# Altium PCB RYA_ESC.PcbDoc (part 3 of 4)
Units mm, origin at the board's own origin, x right, y up, seen from the top; angles counter-clockwise.
Board outline 81.86 x 50.16 mm, 4 copper layers (Top Layer, Signal1, Signal2, Bottom Layer), stack 1.586 mm thick; 309 components, 155 nets, 862 pads, 372 vias.
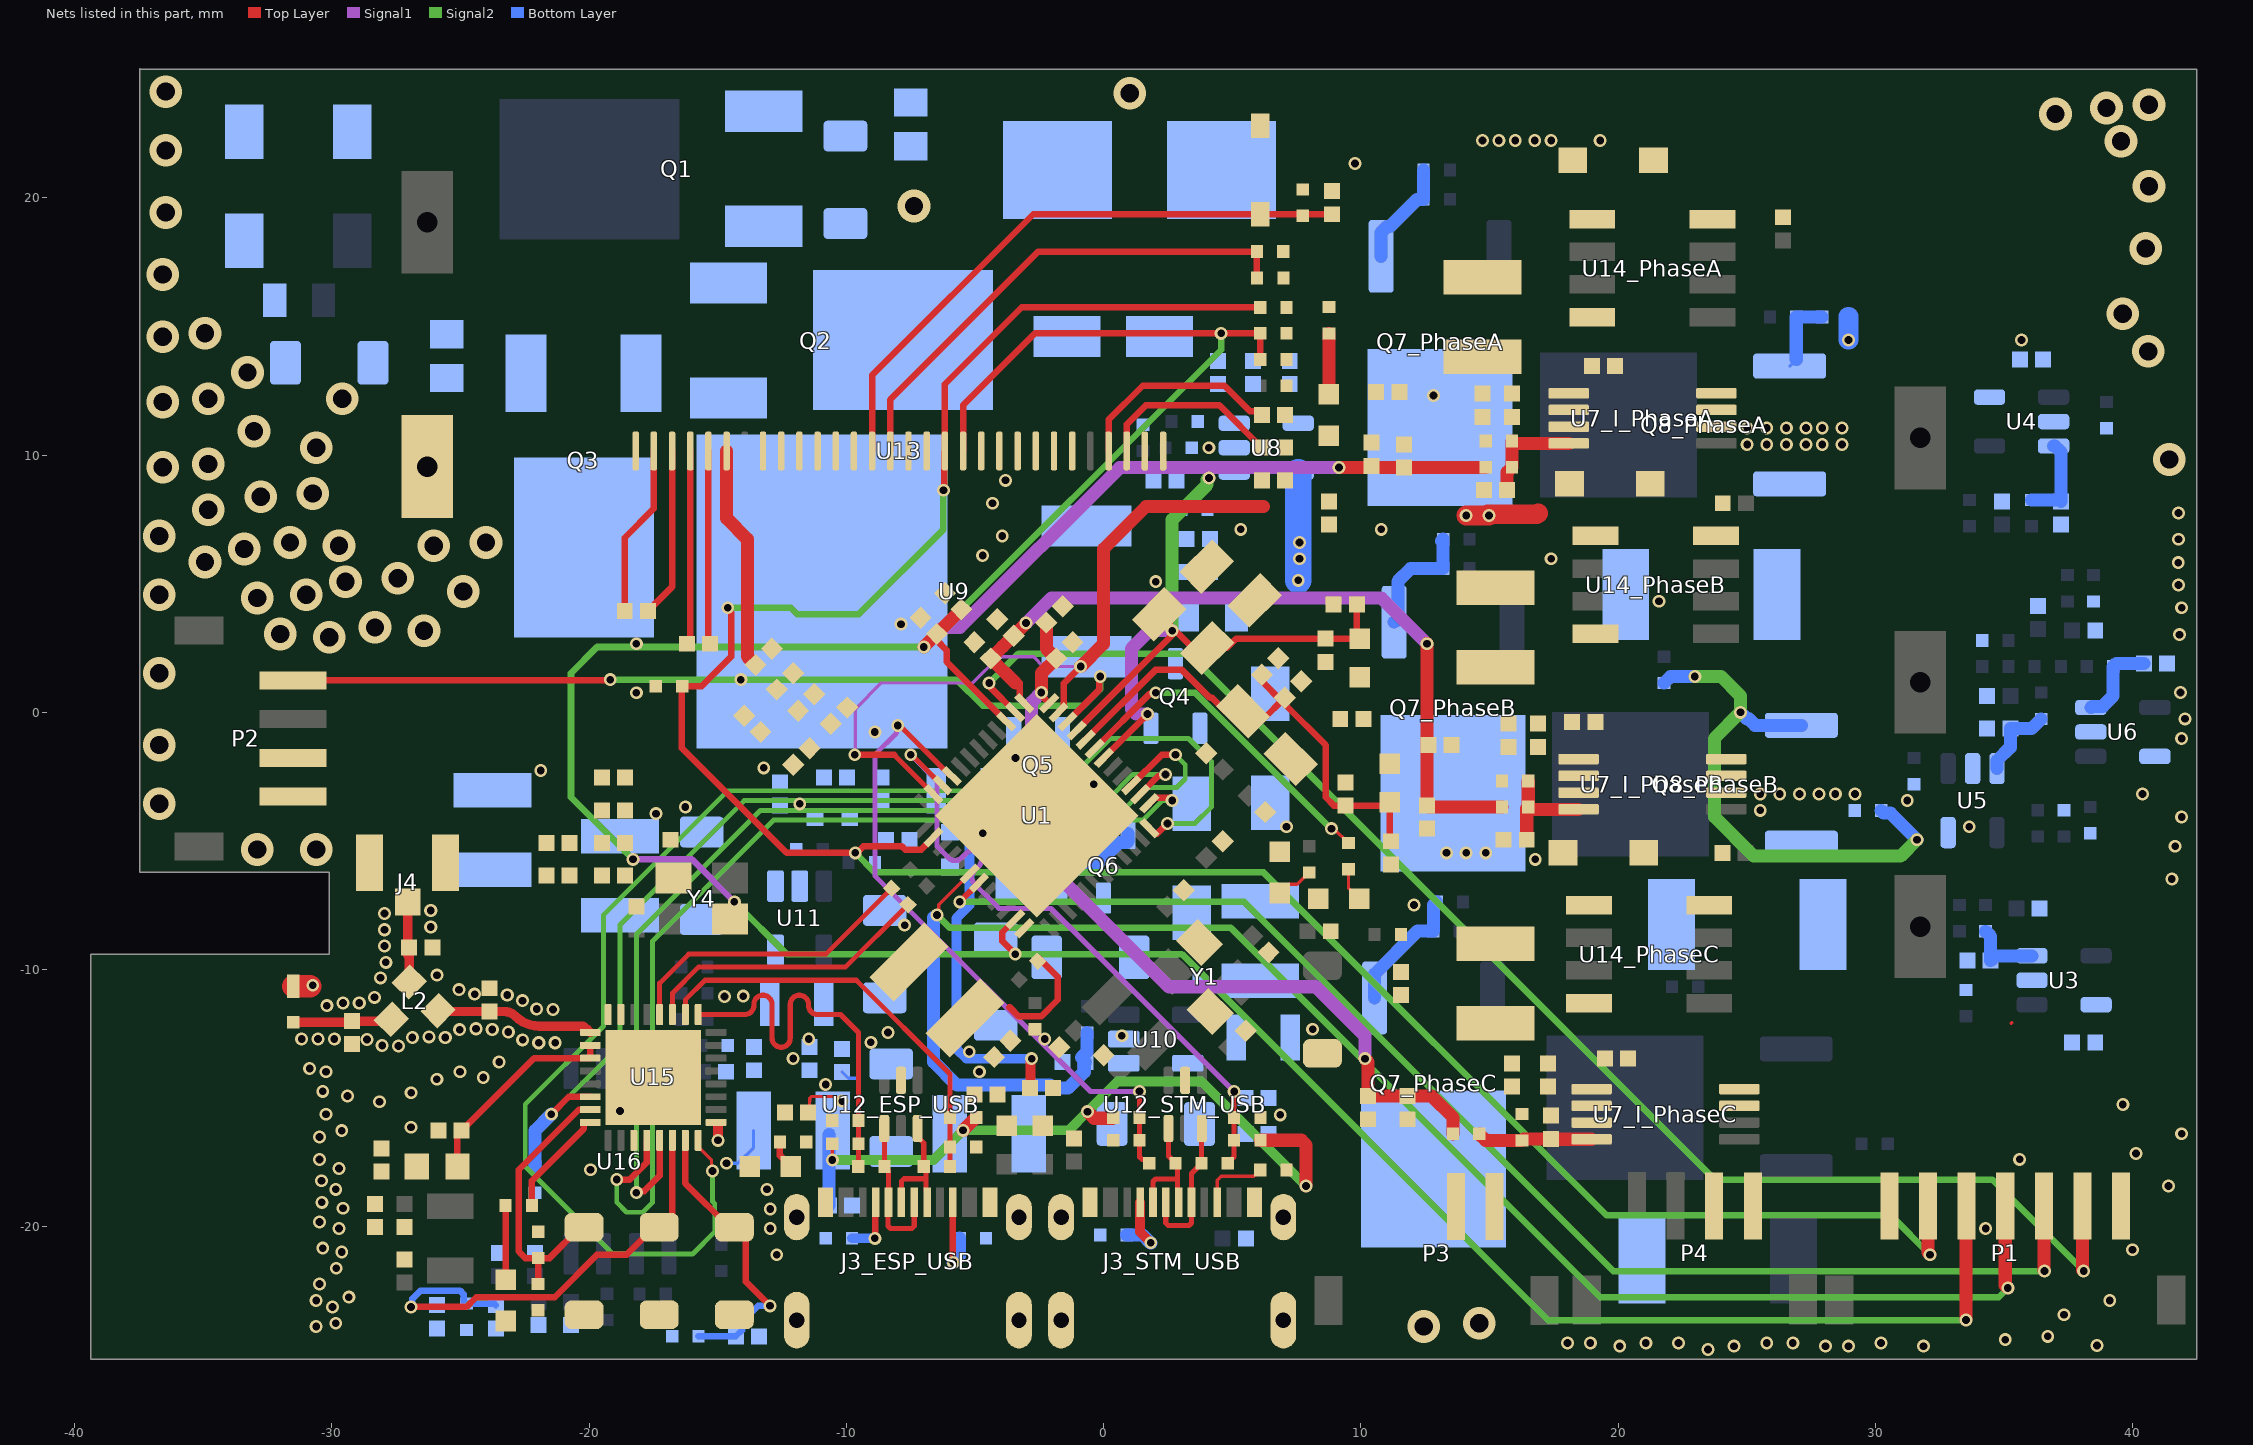
[diagram p4: the nets of this part, all layers, seen from the top]

## Via types
v1: diameter 0.5, hole 0.3, Top Layer to Bottom Layer, tented both sides, 148 vias
v2: diameter 0.5, hole 0.3, Top Layer to Signal1, tented both sides, 58 vias
v3: diameter 0.5, hole 0.3, Top Layer to Signal2, tented both sides, 52 vias
v4: diameter 1.27, hole 0.711, Top Layer to Bottom Layer, tented both sides, 48 vias
v5: diameter 0.508, hole 0.3, Top Layer to Bottom Layer, tented both sides, 34 vias
v6: diameter 0.5, hole 0.3, Bottom Layer to Signal2, tented both sides, 19 vias
v7: diameter 0.5, hole 0.3, Bottom Layer to Signal1, tented both sides, 5 vias
v8: diameter 1.27, hole 0.711, Top Layer to Bottom Layer, 4 vias
v9: diameter 0.5, hole 0.3, Signal1 to Signal2, tented both sides, 4 vias

## Nets (pads, with @x,y where several pads share a name; then routed paths per layer and width w, separated by ;. In a path a pad name is that pad's centre, name@x,y a point inside that pad or via, vN(x,y) a via of type N, cw(c..) or ccw(c..) an arc to the next point about the centre after c; other vN are vias at no path point) (continued)
GND: Ant1.GND C1.2 C2.1 C3.1 C4.1 C5.1 C6.1 C7.1 C8.2 C9.2 C10.1 C11.1 C12.1 C13.2 C14.1 C15.1 C16.1 C17.1 C18.1 C19.1 C20.1 C21.1 C22.1 C23.1 C24.1 C25.1 C26.1 C27.1 C28.1 C29.1 C30.1 C31.1 C32.1 C33.1 C34.1 C35.1 C36.1 C37_I_PhaseA.2 C37_I_PhaseB.2 C37_I_PhaseC.2 C38_I_PhaseA.1 C38_I_PhaseB.1 C38_I_PhaseC.1 C39_I_PhaseA.1 C39_I_PhaseB.1 C39_I_PhaseC.1 C40_I_PhaseA.1 C40_I_PhaseB.1 C40_I_PhaseC.1 C41_I_PhaseA.1 C41_I_PhaseB.1 C41_I_PhaseC.1 C42_I_PhaseA.1 C42_I_PhaseB.1 C42_I_PhaseC.1 C43_I_PhaseA.1 C43_I_PhaseB.1 C43_I_PhaseC.1 C44_I_PhaseA.1 C44_I_PhaseB.1 C44_I_PhaseC.1 C45_I_PhaseA.1 C45_I_PhaseB.1 C45_I_PhaseC.1 C46_I_PhaseA.1 C46_I_PhaseB.1 C46_I_PhaseC.1 C47.1 C48.1 C49.1 C50.1 C51.2 C52.1 C53.1 C54.1 C55.2 C56.1 C57.1 C58.2 C59.1 C60.1 C61.2 C62.1 C63.1 C64.2 C65.1 C66.1 C67.1 C68.1 C69_ESP_USB.1 C69_STM_USB.1 C70_ESP_USB.1 C70_STM_USB.1 C73.1 C74.1 C75.1 C76.1 C77.1 C78.1 C80.2 C81.1 C82.1 C83.1 C84.1 C85.1 C86.1 C87.1 C88.1 C89.1 C90.1 C91.1 C92.1 C93.1 C94.1 C95.1 C96.1 C97.1 C98.1 C99.1 C100.1 C101.1 C102.1 C103.1 C104.1 C105.1 C106.1 C107.1 D1.1 D2.1 D3.A D4.A D5.1 D6.A D7.A D8.1 D11.C D12.A D14.A D15.C D16.A D19.1 J1.1 J3_ESP_USB.A1B12 J3_ESP_USB.B1A12 J3_ESP_USB.SH1 J3_ESP_USB.SH2 J3_ESP_USB.SH3 J3_ESP_USB.SH4 J3_STM_USB.A1B12 J3_STM_USB.B1A12 J3_STM_USB.SH1 J3_STM_USB.SH2 J3_STM_USB.SH3 J3_STM_USB.SH4 J4.2 J4.3 P1.7 P2.3 P3.3 P4.3 Q2.1 Q3.4 Q4.1 Q5.1 Q6.3 R6.1 R14.1 R16.1 R17.1 R18.1 R21.1 R22.1 R24.1 R26_I_PhaseA.2 R26_I_PhaseB.2 R26_I_PhaseC.2 R27_I_PhaseA.1 R27_I_PhaseB.1 R27_I_PhaseC.1 R30.1 R31.1 R34.1 R37.1 R39.1 R41_ESP_USB.2 R41_STM_USB.2 R46_ESP_USB.1 R46_STM_USB.1 R47_ESP_USB.1 R47_STM_USB.1 R48_ESP_USB.1 R48_STM_USB.1 R49.1 R54.1 R55.1 R56.1 R73.1 U1.49 U2.1 U3.2 U4.2 U5.2 U6.2 U7_I_PhaseA.3 U7_I_PhaseA.4 U7_I_PhaseA.7 U7_I_PhaseB.3 U7_I_PhaseB.4 U7_I_PhaseB.7 U7_I_PhaseC.3 U7_I_PhaseC.4 U7_I_PhaseC.7 U8.2 U9.3 U10.2 U11.2 U12_ESP_USB.2 U12_STM_USB.2 U13.1 U13.8 U13.10 U13.12 U13.13 U13.16 U13.17 U13.21 U13.22 U13.23 U13.24 U13.25 U13.29 U13.30 U14_PhaseA.4 U14_PhaseB.4 U14_PhaseC.4 U15.33 U16.4 U17.1 U18.1 U19.1 Y1.2 Y1.4 Y4.2 Y4.4 | length 3.3
  Top Layer w0.127: v1@-30.841,-10.648 ccw(c-30.841,-10.508) v1(-30.742,-10.607)
  Top Layer w0.889: Ant1.GND@-31.496,-10.648 v1@-30.841,-10.648
  Bottom Layer w0.127: v1(-14.652,-17.526) -14.212,-17.526 -13.605,-16.919 C64.2@-13.605,-16.256 ; C65.1@-10.16,-13.981 -9.914,-14.228 -9.648,-14.228
  other v1: 23.495,-24.765 20.066,-24.638 24.511,-24.638 28.067,-24.638 28.956,-24.638 31.877,-24.638 38.618,-24.608 18.034,-24.511 18.923,-24.511 21.082,-24.511 22.352,-24.511 25.781,-24.511 26.797,-24.511 30.226,-24.511 35.052,-24.384 36.703,-24.257 -30.607,-23.876 -29.845,-23.749 37.332,-23.415 -29.972,-23.114 -30.607,-22.86 39.116,-22.86 -29.337,-22.733 -30.48,-22.225 -29.824,-21.607 -29.614,-20.976 39.995,-20.889 -30.353,-20.828 -29.718,-20.066 34.29,-20.066 -30.48,-19.812 -29.561,-19.276 -30.385,-19.048 -29.845,-18.542 41.402,-18.415 -30.403,-18.206 -29.719,-17.733 -30.473,-17.382 35.611,-17.377 40.132,-17.145 -30.48,-16.51 41.91,-16.383 -29.614,-16.26 6.868,-15.646 -30.226,-15.621 39.624,-15.24 -28.141,-15.138 -29.386,-14.91 -26.914,-14.788 -30.353,-14.732 -10.802,-14.469 -25.915,-14.262 -24.109,-14.192 -30.226,-13.97 -25.019,-13.97 -30.861,-13.843 -23.495,-13.589 -8.382,-12.446 12.065,-7.493 41.529,-6.477 41.656,-5.207 41.91,-4.064 31.242,-3.429 41.91,-1.016 42.037,-0.254 41.867,0.767 41.822,3.021 41.91,4.064 21.59,4.318 41.783,4.953 2.032,5.08 41.776,5.819 17.399,5.969 -4.699,6.096 41.783,6.731 -3.937,6.858 5.334,7.112 41.783,7.747 -4.318,8.128 -3.81,9.017 4.093,10.287
  other v2: -12.7,-21.082 -12.954,-20.066 -12.954,-19.304 -13.081,-18.542 -18.796,-15.494 -12.065,-13.452 -9.044,-12.827 -11.459,-12.7 0.711,-12.572 -14.732,-11.049 -14.006,-11.031 -7.731,-8.271 7.112,-4.445 -17.399,-3.937 -16.256,-3.683 -11.811,-3.556 -0.381,-2.794 -13.208,-2.159 -3.425,-1.778 -8.89,-0.762 -18.161,2.667 -7.874,3.429
  other v3: -4.826,-13.97 -4.699,-4.699
  other v4: -32.893,-5.334 -30.607,-5.334 -36.703,-3.556 -36.703,-1.27 -36.703,1.524 -30.099,2.921 -32.004,3.048 -26.416,3.175 -28.321,3.302 -32.893,4.445 -36.703,4.572 -30.988,4.572 -24.892,4.699 -29.464,5.08 -27.432,5.207 -34.925,5.842 -33.401,6.35 -29.718,6.477 -26.035,6.477 -31.623,6.604 -24.003,6.604 -36.703,6.858 -34.798,7.874 -32.766,8.382 -30.734,8.509 -36.576,9.525 -34.798,9.652 41.431,9.825 -30.607,10.287 -33.02,10.922 -36.576,12.065 -34.798,12.192 -29.591,12.192 -33.274,13.208 40.612,14.03 -36.576,14.605 -34.925,14.732 39.624,15.494 -36.576,17.018 40.513,18.034 -36.449,19.431 40.64,20.447 -36.449,21.844 39.551,22.196 37.006,23.256 38.989,23.495 40.64,23.622 -36.449,24.13
  other v5: -27.407,-12.974 -28.042,-12.953 -21.953,-12.843 -21.318,-12.843 -28.631,-12.717 -22.578,-12.73 -31.171,-12.695 -30.536,-12.695 -29.901,-12.695 -26.867,-12.64 -25.589,-12.637 -26.223,-12.612 -23.135,-12.425 -25.03,-12.335 -23.762,-12.324 -24.396,-12.299 -21.402,-11.549 -22.036,-11.533 -30.193,-11.401 -29.566,-11.3 -28.931,-11.297 -22.582,-11.208 -28.336,-11.077 -23.178,-10.989 -24.445,-10.953 -25.056,-10.782 -28.107,-10.319 -25.912,-10.218 -27.898,-9.719 -27.949,-9.086 -27.949,-8.451 -26.153,-8.341 -27.949,-7.816 -26.153,-7.706
  other v6: -2.286,-12.7
  other v8: 12.446,-23.876 14.605,-23.749 -7.366,19.685 1.023,24.069
GPIO3: R72.2 U15.8 | length 4.3
  Top Layer w0.254: R72.2@-22.221,-19.173 -22.221,-18.212 -20.202,-16.193 -20.202,-16.014 -20.131,-15.942 U15.8@-19.951,-15.942
GPIO8: C105.2 R68.1 U15.14 U19.2 | length 18.6
  Top Layer w0.254: v1(-26.924,-23.114) -24.765,-23.114 -24.384,-22.733 -21.336,-22.733 -19.69,-21.087 -18.542,-21.087 -17.472,-20.017 -17.233,-20.017 -16.756,-19.54 U15.14@-16.756,-16.637
  Bottom Layer w0.254: v1(-26.924,-23.114) -26.877,-23.067 -26.877,-22.893 -26.863,-22.879 -26.863,-22.799 -26.543,-22.479 -25.019,-22.479 -24.869,-22.629 -24.869,-22.883 R68.1@-24.769,-22.983 -23.684,-22.983 C105.2@-23.622,-23.045
GPIO9: C104.2 R67.1 U15.15 U18.2 | length 11.3
  Top Layer w0.254: U15.15@-16.256,-16.637 -16.256,-18.312 -14.551,-20.017 -14.387,-20.017 -13.909,-20.494 -13.909,-22.126 v1(-12.965,-23.071)
  Bottom Layer w0.254: R67.1@-15.744,-24.253 -14.297,-24.253 C104.2@-14.293,-24.257 -14.047,-24.01 -14.047,-23.699 -13.419,-23.071 v1(-12.965,-23.071)
I_PhaseA: C43_I_PhaseA.2 C44_I_PhaseA.2 C45_I_PhaseA.2 C46_I_PhaseA.2 R25_I_PhaseA.2 U1.27 | length 31.3
  Top Layer w0.254: C46_I_PhaseA.2@-6.476,3.047 -6.476,2.788 -6.096,2.408 -6.096,1.96 U1.27@-3.783,-0.354
  Top Layer w0.508: v2(-6.985,2.54) -6.982,2.54 C46_I_PhaseA.2@-6.476,3.047 ; C46_I_PhaseA.2@-6.436,3.087 C45_I_PhaseA.2@-5.524,3.999 ; v2(9.155,9.514) C43_I_PhaseA.2@11.684,9.514 11.695,9.525 R25_I_PhaseA.2@14.855,9.525
  Signal1 w0.508: v2(-6.985,2.54) -6.223,3.302 -5.588,3.302 0.624,9.514 v2(9.155,9.514)
I_PhaseB: C43_I_PhaseB.2 C44_I_PhaseB.2 C45_I_PhaseB.2 C46_I_PhaseB.2 R25_I_PhaseB.2 U1.25 | length 30.2
  Top Layer w0.254: -3.254,1.143 -3.254,0.603 -3.284,0.573 -3.284,0.562 U1.25@-3.075,0.354
  Top Layer w0.508: -3.429,1.143 C43_I_PhaseB.2@-4.381,2.095 -4.341,2.134 -3.936,2.539 -3.897,2.578 C44_I_PhaseB.2@-3.492,2.984 -3.492,2.991 v2(-3.01,3.473) ; C45_I_PhaseB.2@12.573,-1.27 C46_I_PhaseB.2@12.573,-3.614 12.642,-3.683 R25_I_PhaseB.2@15.49,-3.683 ; v2(12.573,2.667) 12.573,-1.028 12.575,-1.03 12.575,-1.214 C45_I_PhaseB.2@12.603,-1.242 ; C45_I_PhaseB.2@12.575,-1.27 C45_I_PhaseB.2@12.603,-1.242 ; C45_I_PhaseB.2@12.631,-1.27 C45_I_PhaseB.2@12.603,-1.242 ; C45_I_PhaseB.2@12.631,-1.214 C45_I_PhaseB.2@12.603,-1.242
  Signal1 w0.508: v2(-3.01,3.473) -3.002,3.473 -2.031,4.445 10.795,4.445 v2(12.573,2.667)
I_PhaseC: C43_I_PhaseC.2 C44_I_PhaseC.2 C45_I_PhaseC.2 C46_I_PhaseC.2 R25_I_PhaseC.2 U1.24 | length 32.6
  Top Layer w0.254: v2(-2.416,0.774) -2.369,0.727 -2.369,0.616 U1.24@-2.107,0.354
  Top Layer w0.508: v2(-2.416,0.774) -2.416,1.521 C43_I_PhaseC.2@-1.842,2.095 -2.223,2.476 C46_I_PhaseC.2@-2.223,3.492 ; v2(10.16,-13.462) 10.287,-13.589 C45_I_PhaseC.2@10.287,-14.917 C44_I_PhaseC.2@11.811,-14.917 12.758,-14.917 13.585,-15.744 R25_I_PhaseC.2@13.585,-16.383
  Signal1 w0.508: v2(-2.416,0.774) -2.794,0.396 -2.794,-5.334 2.54,-10.668 8.255,-10.668 10.16,-12.573 v2(10.16,-13.462)
IPEX: C89.2 J4.1 L2.1 | length 3.3
  Top Layer w0.363: C89.2@-27.051,-9.437 -27.051,-9.202 C89.2@-26.993,-9.144 -27.051,-9.086 J4.1@-27.051,-7.367 ; L2.1@-27.043,-10.482 L2.1@-26.96,-10.454 ; L2.1@-26.987,-10.481 C89.2@-26.987,-9.437
LNA_IN: C96.2 L2.2 U15.1 | length 6.2
  Top Layer w0.363: L2.2@-25.87,-11.599 L2.2@-25.787,-11.57 ; L2.2@-25.843,-11.626 L2.2@-25.787,-11.57 ; U15.1@-20.102,-12.323 -20.229,-12.196 -21.931,-12.196 cw(c-21.931,-10.882) -22.86,-11.811 ccw(c-23.307,-12.258) -23.307,-11.626 C96.2@-23.876,-11.626 -25.481,-11.626 -25.536,-11.57 L2.2@-25.787,-11.57 ; U15.1@-20.07,-12.323 U15.1@-19.951,-12.442
MCU3V3: R42_ESP_USB.2 R42_STM_USB.2 R43_ESP_USB.2 R43_STM_USB.2 | length 27.2
  Top Layer w0.127: R42_ESP_USB.2@-10.545,-16.768 -10.545,-17.395 v3(-10.541,-17.399)
  Top Layer w0.508: v3(-5.465,-16.249) -5.454,-16.249 R43_ESP_USB.2@-4.949,-15.744 ; v3(-0.625,-15.521) -0.578,-15.567 -0.367,-15.778 R42_STM_USB.2@0.351,-15.778 ; R43_STM_USB.2@6.1,-16.633 7.688,-16.633 7.874,-16.819 v3(7.874,-18.415)
  Signal2 w0.381: v3(-10.541,-17.399) -6.615,-17.399 v3(-5.465,-16.249) -1.353,-16.249 v3(-0.625,-15.521) 0.545,-14.351 3.81,-14.351 v3(7.874,-18.415)
NetC8_1: C8.1 C9.1 C10.2 C11.2 FB1.2 U1.21 | length 15.8
  Top Layer w0.254: U1.21@-1.046,-0.707 2.815,3.154 ; C9.1@2.159,3.81 2.815,3.154 ; C8.1@3.552,2.503 C8.1@4.027,2.503 ; C10.2@9.848,4.191 9.848,2.967 FB1.2@9.957,2.858 9.952,2.863 C11.2@8.636,2.863 5.153,2.863 4.792,2.503 C8.1@4.027,2.503 ; 2.815,3.154 3.466,2.503 C8.1@4.027,2.503
NetC13_1: C13.1 C14.2 C15.2 C16.2 C17.2 FB2.2 U1.20 | length 20.8
  Top Layer w0.254: U1.20@-0.692,-1.061 2.019,1.651 3.048,1.651 4.14,0.559 4.226,0.559 4.748,0.037 C13.1@5.424,0.037 ; C17.2@6.159,1.46 6.159,1.206 6.921,0.444 C13.1@6.309,-0.168 ; C14.2@7.048,0.571 7.048,0.444 7.048,0.317 8.636,-1.271 8.636,-3.302 8.959,-3.625 C15.2@9.398,-3.625 10.993,-3.625 FB2.2@11.125,-3.493 11.125,-4.96 C16.2@11.176,-5.011 ; C13.1@5.424,0.037 C13.1@5.629,-0.168 ; C13.1@5.424,0.037 C13.1@5.629,-0.168 ; C13.1@5.629,-0.168 C13.1@6.309,-0.168 ; C13.1@5.629,-0.168 C13.1@6.309,-0.168
NetC23_2: C23.2 R12.1 U3.3 | length 2.9
  Bottom Layer w0.508: R12.1@34.29,-8.513 34.486,-8.709 C23.2@34.486,-9.652 34.674,-9.464 U3.3@36.093,-9.464
NetC28_2: C28.2 R19.1 U4.3 | length 3.5
  Bottom Layer w0.508: R19.1@36.068,8.259 37.149,8.259 C28.2@37.211,8.197 37.211,10.123 36.981,10.353 U4.3@36.932,10.353
NetC30_2: C30.2 R20.1 U5.3 | length 3.1
  Bottom Layer w0.508: U5.3@34.732,-2.184 34.732,-1.874 35.248,-1.358 C30.2@35.248,-0.635 36.072,-0.635 R20.1@36.449,-0.258
NetC34_2: C34.2 R23.1 U6.3 | length 3.4
  Bottom Layer w0.508: U6.3@38.379,0.188 38.425,0.234 38.842,0.234 39.247,0.639 R23.1@39.247,1.778 39.374,1.905 C34.2@40.444,1.905
NetC42_I_PhaseA_2: C42_I_PhaseA.2 R25_I_PhaseA.1 R27_I_PhaseA.2 U7_I_PhaseA.8 | length 4.2
  Top Layer w0.508: C42_I_PhaseA.2@15.69,8.636 15.69,9.336 R25_I_PhaseA.1@15.879,9.525 R27_I_PhaseA.2@15.879,10.545 15.969,10.455 U7_I_PhaseA.8@18.085,10.455
NetC42_I_PhaseB_2: C42_I_PhaseB.2 R25_I_PhaseB.1 R27_I_PhaseB.2 U7_I_PhaseB.8 | length 4.3
  Top Layer w0.508: C42_I_PhaseB.2@16.452,-4.953 16.452,-3.745 R25_I_PhaseB.1@16.514,-3.683 ; R27_I_PhaseB.2@16.51,-2.667 16.51,-3.679 R25_I_PhaseB.1@16.514,-3.683 ; U7_I_PhaseB.8@18.466,-3.769 16.6,-3.769 R25_I_PhaseB.1@16.514,-3.683
NetC42_I_PhaseC_2: C42_I_PhaseC.2 R25_I_PhaseC.1 R27_I_PhaseC.2 U7_I_PhaseC.8 | length 4.5
  Top Layer w0.508: R25_I_PhaseC.1@14.609,-16.383 14.609,-16.395 14.855,-16.641 R27_I_PhaseC.2@16.26,-16.641 16.322,-16.579 C42_I_PhaseC.2@17.399,-16.579 17.416,-16.596 U7_I_PhaseC.8@18.974,-16.596
NetC48_2: C48.2 C49.2 C50.2 R29.1 U8.3
NetC55_1: C55.1 C57.2 D3.K FB3.2 R32.2 U10.1 | length 13.6
  Bottom Layer w0.508: -6.604,-7.978 -6.604,-13.589 -5.701,-14.492 -2.077,-14.492 -1.964,-14.605 -1.381,-14.605 -0.749,-13.973 -0.749,-13.645 C57.2@-0.693,-13.589 ; C57.2@-0.859,-13.423 -0.635,-13.199 R32.2@-0.635,-12.45
NetC58_1: C58.1 C59.2 C60.2 D4.K F1.0 U10.5
NetC61_1: C61.1 C63.2 D6.K FB4.2 R35.2 U11.1
NetC64_1: C64.1 C65.2 C66.2 D7.K F2.0 U11.5 | length 3
  Bottom Layer w0.127: C64.1@-10.679,-16.41 C64.1@-10.525,-16.256
  Bottom Layer w0.508: C66.2@-10.679,-19.177 C64.1@-10.679,-16.41
NetC73_2: C73.2 U13.27 | length 8.2
  Top Layer w0.254: U13.27@0.195,10.16 0.195,11.371 1.524,12.7 4.699,12.7 5.702,11.697 6.014,11.697 C73.2@6.154,11.557
NetC74_2: C74.2 U13.28 | length 7.3
  Top Layer w0.254: U13.28@0.902,10.16 0.902,11.189 1.651,11.938 4.503,11.938 C74.2@6.154,10.287
NetC75_2: C75.2 D17.A R53.1 U13.14 | length 23.5
  Top Layer w0.254: U13.14@-8.996,10.16 -8.996,13.102 -2.736,19.362 D17.A@6.096,19.362 7.681,19.362 R53.1@7.743,19.3 7.805,19.362 C75.2@8.89,19.362
NetC79_PhaseA_1: C79_PhaseA.1 D18_PhaseA.K U14_PhaseA.8
NetC79_PhaseB_1: C79_PhaseB.1 D18_PhaseB.K U14_PhaseB.8
NetC79_PhaseC_1: C79_PhaseC.1 D18_PhaseC.K U14_PhaseC.8
NetC90_2: C90.2 L1.1 U15.2 U15.3 | length 8.1
  Top Layer w0.254: L1.1@-25.118,-17.653 -25.118,-16.424 C90.2@-24.95,-16.256 -22.136,-13.442 U15.3@-19.951,-13.442 U15.2@-19.951,-12.942
NetD1_2: D1.2 R1.1 | length 1.3
  Top Layer w0.127: R1.1@9.521,-6.1 9.521,-6.816 D1.2@9.944,-7.239
NetD2_2: D2.2 R4.1 | length 1.5
  Top Layer w0.127: D2.2@6.858,-7.023 7.195,-6.686 7.525,-6.686 7.985,-6.227 R4.1@7.997,-6.227
NetD5_2: D5.2 R33.1 | length 2.4
  Top Layer w0.127: D5.2@8.759,12.361 D5.2@8.763,12.357
  Top Layer w0.508: D5.2@8.759,12.361 R33.1@8.759,14.728
NetD8_2: D8.2 R36.1 | length 1.1
  Top Layer w0.254: R36.1@-12.577,-16.696 -12.577,-17.23 D8.2@-12.154,-17.653
NetD9_A: D9.A D11.A
NetD10_A: D10.A Q1.1 R39.2
NetD10_K: D10.K Q1.3 Q2.3 Q3.3 R38.2
NetD12_K: D12.K Q3.1 R38.1
NetD13_A: D13.A D15.A
NetD14_K: D14.K Q4.2 Q5.2 Q6.2 R40.2 | length 4.2
  Bottom Layer w0.508: R40.2@-1.944,-6.731 -1.881,-6.794 -1.648,-6.562 -1.648,-6.181 -1.563,-6.096 -0.432,-6.096 0.599,-5.065 0.909,-5.065 0.95,-5.024 Q6.2@0.95,-4.714
NetD16_K: D16.K Q6.1 R40.1
NetD19_2: D19.2 R72.1 | length 2.9
  Top Layer w0.254: R72.1@-23.245,-19.173 -23.245,-22.056 D19.2@-23.241,-22.06
NetF3_1: F3.1 Q2.4
NetF4_0: F4.0 Q5.3
NetJ3_ESP_USB_A5: J3_ESP_USB.A5 R41_ESP_USB.1 | length 2.3
  Top Layer w0.127: v1(-8.89,-20.447) v1@-8.874,-20.431 ; J3_ESP_USB.A5@-8.874,-19.066 J3_ESP_USB.A5@-8.857,-19.05
  Top Layer w0.254: v1@-8.874,-20.431 J3_ESP_USB.A5@-8.874,-19.066
  Bottom Layer w0.127: v1@-8.894,-20.443 v1(-8.89,-20.447)
  Bottom Layer w0.381: R41_ESP_USB.1@-9.775,-20.443 v1@-8.894,-20.443
NetJ3_ESP_USB_B5: J3_ESP_USB.B5 R48_ESP_USB.2 | length 3.4
  Top Layer w0.254: J3_ESP_USB.B5@-5.857,-19.05 -5.857,-21.364 v1(-5.842,-21.379)
  Bottom Layer w0.508: v1(-5.842,-21.379) -5.592,-21.129 R48_ESP_USB.2@-5.592,-20.443
NetJ3_STM_USB_A5: J3_STM_USB.A5 R41_STM_USB.1 | length 2.8
  Top Layer w0.381: J3_STM_USB.A5@1.421,-19.05 1.421,-20.203 v1(1.838,-20.62)
  Bottom Layer w0.508: R41_STM_USB.1@0.893,-20.316 1.519,-20.316 1.823,-20.62 v1(1.838,-20.62)
NetJ3_STM_USB_B5: J3_STM_USB.B5 R48_STM_USB.2 | length 2.7
  Top Layer w0.127: J3_STM_USB.B5@4.421,-19.05 4.421,-18.185 4.572,-18.034 5.842,-18.034 5.905,-17.97 5.918,-17.97 6.092,-17.796 R48_STM_USB.2@6.092,-17.784
NetQ7_PhaseA_1: Q7_PhaseA.1 R57_PhaseA.2 R58_PhaseA.2 | length 4.3
  Bottom Layer w0.508: Q7_PhaseA.1@10.791,17.729 10.791,18.659 11.022,18.89 11.139,18.89 12.192,19.943 R58_PhaseA.2@12.442,19.943 R57_PhaseA.2@12.442,21.082
NetQ7_PhaseB_1: Q7_PhaseB.1 R57_PhaseB.2 R58_PhaseB.2 | length 4.8
  Bottom Layer w0.508: Q7_PhaseB.1@11.299,3.505 11.443,3.649 11.443,5.093 11.942,5.592 R58_PhaseB.2@13.204,5.592 13.204,6.604 13.14,6.667 R57_PhaseB.2@13.204,6.731
NetQ7_PhaseC_1: Q7_PhaseC.1 R57_PhaseC.2 R58_PhaseC.2 | length 5.1
  Bottom Layer w0.508: Q7_PhaseC.1@10.537,-11.1 10.537,-10.17 12.202,-8.505 R58_PhaseC.2@12.823,-8.505 12.823,-7.493 R57_PhaseC.2@12.95,-7.366
NetQ8_PhaseA_1: Q8_PhaseA.1 R59_PhaseA.2 R60_PhaseA.2 | length 3
  Bottom Layer w0.127: Q8_PhaseA.1@26.67,13.462 Q8_PhaseA.1@26.928,13.72
  Bottom Layer w0.508: Q8_PhaseA.1@26.928,13.72 R59_PhaseA.2@26.928,15.367 ; R59_PhaseA.2@26.932,15.371 R60_PhaseA.2@27.936,15.371
NetQ8_PhaseA_3: Q8_PhaseA.3 R26_I_PhaseA.1 R60_PhaseA.1 U7_I_PhaseA.2 | length 0.9
  Bottom Layer w0.762: v1(28.956,14.478) 28.96,14.482 R60_PhaseA.1@28.96,15.371
  other v1: 25.019,10.414 25.781,10.414 26.543,10.414 27.305,10.414 27.94,10.414 28.702,10.414 25.019,11.049 25.781,11.049 26.543,11.049 27.305,11.049 27.94,11.049 28.702,11.049
NetQ8_PhaseB_1: Q8_PhaseB.1 R59_PhaseB.2 R60_PhaseB.2 | length 21.7
  Signal2 w0.508: v6(22.987,1.397) 24.003,1.397 24.758,0.642 v6(24.758,0) 23.749,-1.009 23.749,-4.064 25.273,-5.588 30.988,-5.588 v6(31.623,-4.953)
  Bottom Layer w0.508: R59_PhaseB.2@21.789,1.139 22.043,1.393 22.983,1.393 v6(22.987,1.397) ; v6(24.758,0) 25.008,-0.25 25.077,-0.25 25.331,-0.504 Q8_PhaseB.1@27.127,-0.504 ; R60_PhaseB.2@30.23,-3.814 30.33,-3.914 30.584,-3.914 v6(31.623,-4.953)
NetQ8_PhaseB_3: Q8_PhaseB.3 R26_I_PhaseB.1 R60_PhaseB.1 U7_I_PhaseB.2
  other v1: 25.527,-3.81 25.527,-3.175 26.289,-3.175 27.051,-3.175 27.813,-3.175 28.448,-3.175 29.21,-3.175